# Allegro board TPS54331_demo.brd
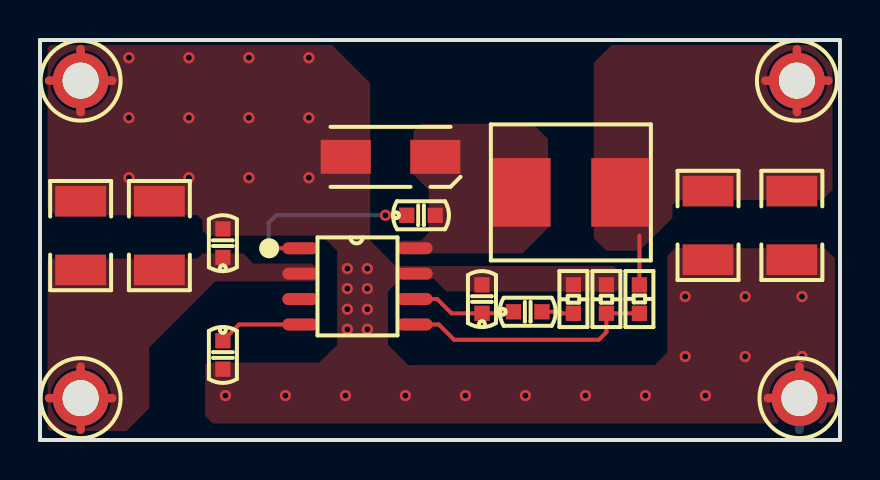
[diagram p0: board, top side]
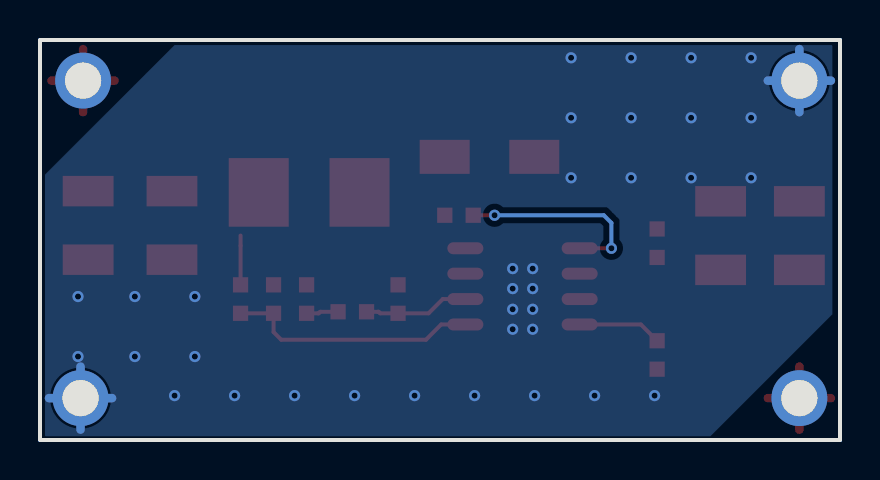
[diagram p1: board, bottom side, seen from below]

Outline 40 x 20 mm; copper layers: TOP, BOTTOM. Coordinates in mm from the lower left corner of the outline.
Outline path: 0,20 10,20 ; 0,20 40,20 40,0 0,0 ; 0,20 0,0 ; 0,0 10,0

## Design rules (mm)
constraint set DEFAULT: min track width 0.127, pair gap 0.127

## Placement (name value [footprint] x y rotation side)
C1  104  [C0603]  19.05 11.24 0 top
C2  476  [C1210]  33.4 10.73 270 top
C3  476  [C1210]  37.59 10.73 270 top
C4  106  [C1210]  2.03 10.22 90 top
C5  106  [C1210]  5.97 10.22 90 top
C6  104  [C0603]  9.14 4.25 270 top
C7  472  [C0603]  24.38 6.41 0 top
C8  104  [C0603]  9.14 9.84 90 top
C9  390  [C0603]  22.1 7.05 90 top
D1  B340A  [SMA]  17.53 14.16 180 top
L1  6.8uH  [L2525]  26.54 12.38 0 top
NOREF  -  []  40 0 90 top
NOREF#2  -  []  0 20 0 top
R1  1002  [R0603]  29.97 7.05 90 top
R2  4992  [R0603]  26.67 7.05 270 top
R3  2491  [R0603]  28.32 7.05 270 top
TP1  IN  [TP_1R8]  2.03 2.09 0 top
TP2  GND  [TP_1R8]  2.03 17.97 0 top
TP3  OUT  [TP_1R8]  37.85 17.97 0 top
TP4  GND  [TP_1R8]  37.97 2.09 0 top
U1  TPS54331D  [SO8N_6R0_1R27]  13.02 9.59 0 top

## Library data of the parts
C1-C9 = CAP_NP
D1 = V_DIODE
L1 = L
R1-R3 = R2
TP1-TP4 = TP_TEST-POINT
U1 = N_PWR_TPS54331D

## Footprints (pads in the part's own frame, mm; a bottom-side part is the same pattern mirrored in y, then rotated)
C0603
  rect 0.762x0.762 smd: 1(-0.711,0) 2(0.711,0)
C1210
  rect 1.524x2.54 smd: 1(-1.714,0) 2(1.714,0)
L2525
  rect 3x3.429 smd: 1(-2.52,0) 2(2.52,0)
R0603
  rect 0.762x0.762 smd: 1(-0.711,0) 2(0.711,0)
SMA
  rect 2.5x1.7 smd: 1(-2.24,0) 2(2.24,0)
SO8N_6R0_1R27
  oval 1.8x0.6 smd: 1(0,0) 2(0,-1.27) 3(0,-2.54) 4(0,-3.81) 5(5.715,-3.81) 6(5.715,-2.54) 7(5.715,-1.27) 8(5.715,0)
TP_1R8
  round 2.794 hole 1.803: 1(0,0)

## Nets
GND: C2.2 C3.2 C4.2 C5.2 C6.2 C8.2 C9.2 D1.2 R2.1 R3.1 TP2.1(TP) TP4.1(TP) U1.7
VCC_4V: C2.1 C3.1 L1.2 R1.2 TP3.1(TP)
VCC_IN: C4.1 C5.1 C8.1 TP1.1(TP) U1.2
N16847616: C1.1 U1.1
N16847620: C1.2 D1.1(K) L1.1 U1.8
N16847724: C7.1 C9.1 U1.6
N16847764: C6.1 U1.4
N16847768: R1.1 R3.2 U1.5(VSENSE)
N16847850: C7.2 R2.2

Pads without a net: U1 3

## Via types
v1: diameter 0.559, hole 0.305, TOP to BOTTOM, 37 vias

## Routing (per net, layer and track width the routed paths; a pad name or vN(x,y) marks a point on that pad's centre or on a via; arc(x,y) is an arc through that point)
GND: length 23.6
  TOP w0.427: TP4.1 37.97,3.67 ; TP4.1 36.4,2.09 ; TP4.1 39.55,2.09 ; TP2.1 3.61,17.97 ; TP2.1 2.03,19.54 ; TP2.1 0.46,17.97 ; TP2.1 2.03,16.39
  BOTTOM w0.427: TP2.1 2.03,19.54 ; TP2.1 0.46,17.97 ; TP2.1 2.03,16.39 ; TP2.1 3.61,17.97 ; 37.97,0.52 TP4.1 ; TP4.1 37.97,3.67 ; TP4.1 39.55,2.09 ; TP4.1 36.4,2.09
  vias: v1(4.45,19.11) v1(4.45,16.11) v1(4.45,13.11) v1(7.45,19.11) v1(7.45,16.11) v1(7.45,13.11) v1(9.27,2.22) v1(10.45,19.11) v1(10.45,16.11) v1(10.45,13.11) v1(12.27,2.22) v1(13.45,19.11) v1(13.45,16.11) v1(13.45,13.11) v1(15.27,2.22) v1(15.37,8.57) v1(15.37,7.57) v1(15.37,6.54) v1(15.37,5.54) v1(16.37,8.57) v1(16.37,7.57) v1(16.37,6.54) v1(16.37,5.54) v1(18.27,2.22) v1(21.27,2.22) v1(24.27,2.22) v1(27.27,2.22) v1(30.27,2.22) v1(32.26,7.17) v1(32.26,4.17) v1(33.27,2.22) v1(35.26,7.17) v1(35.26,4.17) v1(38.1,7.17) v1(38.1,4.17)
VCC_4V: length 8.8
  TOP w0.2: R1.2 29.97,10.22
  TOP w0.427: 36.27,17.97 TP3.1 ; TP3.1 37.85,19.54 ; TP3.1 37.85,16.39 ; TP3.1 39.42,17.97
VCC_IN: length 6.3
  TOP w0.427: 2.03,0.52 TP1.1 ; TP1.1 2.03,3.67 ; TP1.1 0.46,2.09 ; TP1.1 3.61,2.09
N16847616: length 9.9
  TOP w0.2: C1.1 v1(17.27,11.24) ; U1.1 v1(11.43,9.59)
  BOTTOM w0.2: v1(17.27,11.24) 11.81,11.24 11.43,10.86 v1(11.43,9.59)
N16847724: length 5.4
  TOP w0.127: 23.1,6.41 23.02,6.33 22.99,6.33
  TOP w0.2: C7.1 23.06,6.41 22.99,6.33 C9.1 20.57,6.33 19.86,7.05 U1.6
N16847764: length 4.2
  TOP w0.2: C6.1 9.96,5.78 U1.4
N16847768: length 12.7
  TOP w0.2: U1.5 19.94,5.78 20.7,5.01 27.94,5.01 28.32,5.39 R3.2 R1.1
N16847850: length 1.8
  TOP w0.127: 25.99,6.41 26.02,6.41 26.1,6.33
  TOP w0.2: C7.2 25.99,6.41 26.06,6.33 R2.2

## Copper pours and planes (outline as drawn; the poured copper is in the pictures)
GND on TOP: 0.38,19.62 0.38,11.62 0.76,11.24 7.87,11.24 8.13,10.98 8.13,10.47 8.38,10.22 14.1,10.22 14.86,9.46 14.86,4.76 13.97,3.87 8.38,3.87 8.26,3.74 8.26,1.2 8.64,0.82 39.12,0.82 39.75,1.46 39.75,9.08 39.24,9.59 31.75,9.59 31.37,9.21 31.37,4.38 30.73,3.74 18.41,3.74 17.4,4.76 17.4,7.43 18.03,8.06 19.68,8.06 20.32,7.43 28.83,7.43 28.96,7.55 28.96,8.44 28.7,8.7 17.78,8.7 16.51,9.97 16.51,17.84 14.61,19.75 0.51,19.75
GND on BOTTOM: 6.48,0.19 0.38,6.28 0.38,19.75 33.27,19.75 39.75,13.27 39.75,0.19
VCC_4V on TOP: 27.69,18.86 27.69,10.09 28.32,9.46 29.97,9.46 31.62,11.11 31.62,11.75 31.88,12 39.12,12 39.62,12.51 39.62,18.73 38.61,19.75 28.57,19.75
VCC_IN on TOP: 0.51,0.44 4.32,0.44 5.46,1.58 5.46,4.63 8.76,7.94 13.72,7.94 13.97,8.19 13.97,8.44 13.59,8.82 10.67,8.82 10.16,9.33 8.13,9.33 7.87,9.08 0.51,9.08 0.38,8.95 0.38,0.57
N16847620 on TOP: 17.78,9.71 17.78,9.46 17.91,9.33 24.13,9.33 25.4,10.6 25.4,15.05 24.64,15.81 19.05,15.81 18.67,15.43 18.67,13.27 19.43,12.51 19.43,10.35 19.05,9.97 18.03,9.97

## Text on the board
NCLEGEND-1-2: FIGURE | FINISHED_SIZE | 0.3048 | 1.8034 | DRILL CHART: TOP to BOTTOM | ALL UNITS ARE IN MILLIMETERS | TOLERANCE_DRILL | +0.0/-0.0 | +0.0762/-0.0762 | PLATED | QTY | 37 | 4
